# EAGLE board MediumCollar1.1 v33 (EAGLE 9.7.0)
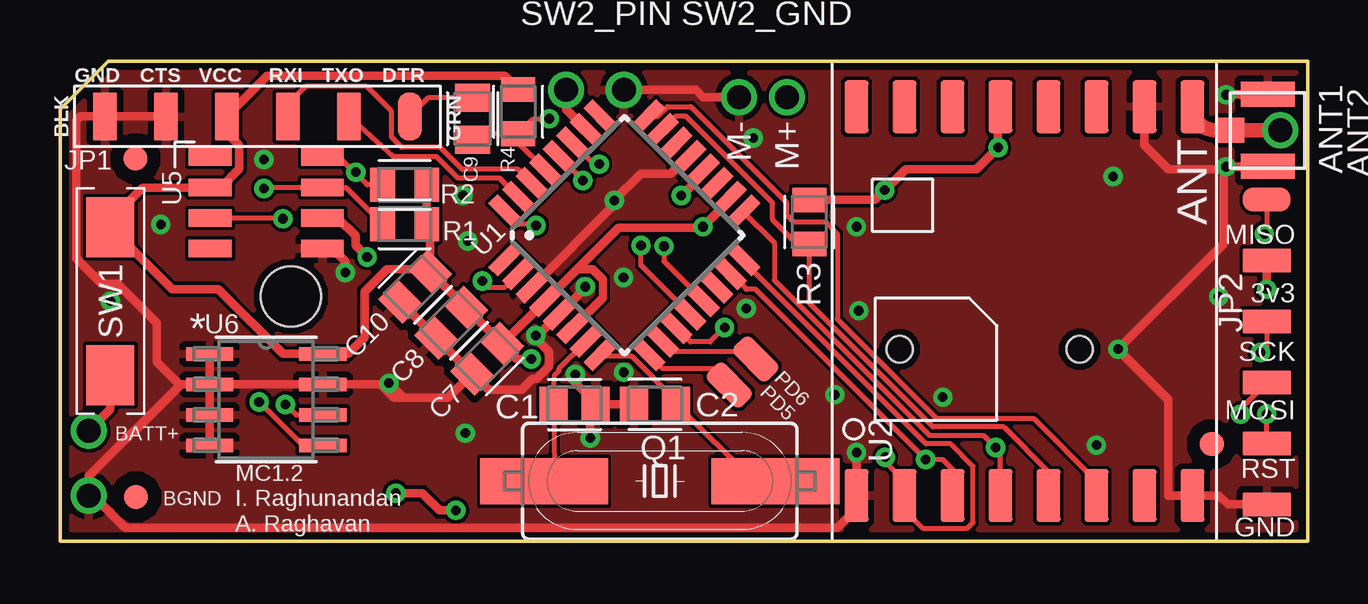
[diagram p0: board, top side]
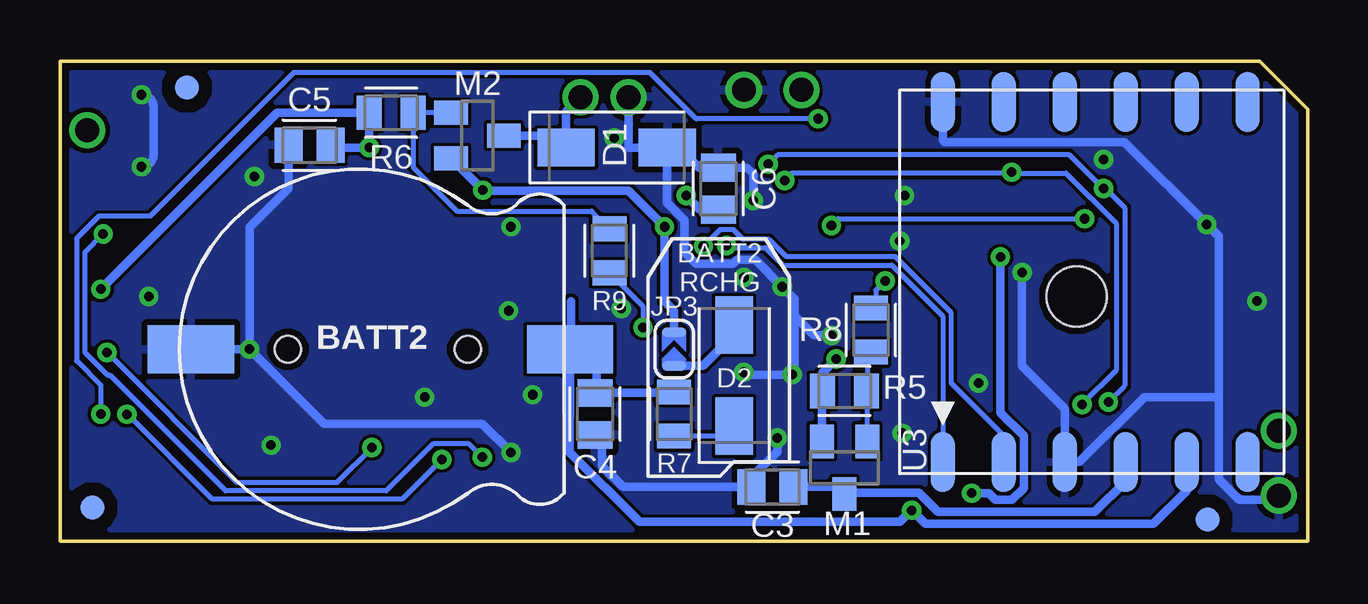
[diagram p1: board, bottom side, seen from below]

Size 52 x 20 mm. Coordinates in mm from the lower left corner, seen from the top.
Outline: 0,18 2,20 52,20 52,0 0,0 0,18
Copper layers (1*16): Top 0.035mm / dielectric 1.5mm / Bottom 0.035mm
Design rules "PCBPower": minimum track width 6mil, minimum drill 0.35mm, track to track 6mil, track to pad 6mil, pad to pad 6mil, via to via 6mil, smd to smd 6mil, copper to edge 12mil, drill to drill 12mil, minimum pad ring 10mil, minimum via ring 8mil, stop-mask expansion 4mil, vias tented up to drill 0.4mm, thermal gap 10mil
Net classes: 0 default: width 0.2 mm, drill 0.4 mm; 1 Power: width 0.35 mm, drill 0.4 mm; 2 RF: width 0.35 mm, drill 0.4 mm, clearance 0.203 mm

## Footprints (pad centres in the part's own frame; a part is rotated, then mirrored left to right if it is on the bottom)
BREAKOUT_THT*1*1MM = drill 1: P$1 0,0
U.FL-R-SMT-1(XX) = smd 1.05 x 1.1: 1 0,1.525 | smd 1.05 x 2.25: 2 -1.5,0; 3 1.5,0
CR1220_2P_SMD = smd 3.6 x 2: P+ 8.26,0; P- -7.54,0 | hole 1.1: -3.5,0; 4,0
CAPC2012X110 = smd 1.165 x 1.465: 1 -0.875,0; 2 0.875,0
DIOM5226X290N = smd 2.392 x 1.565: 1 -2.108,0; 2 2.108,0
FIDUCIAL_1MM = smd 1 x 1: 1 0,0
FTDI_DEVICE_SMD(GTS_FLIP) = smd 1 x 2: P1 -6.35,0; P2 -3.81,0; P3 -1.27,0; P4 1.27,0; P5 3.81,0; P6 6.35,0
1X6-THT = smd 1 x 2: P1 -6.35,0; P2 -3.81,0; P3 -1.27,0; P4 1.27,0; P5 3.81,0; P6 6.35,0
NO_JUMPER = smd 0.4 x 1: P$1 -0.7,0; P$2 0.7,0
SOT23 = smd 1 x 1.4: 1 -0.95,-1.1; 2 0.95,-1.1; 3 0,1.1
BREAKOUT_PAD*1*1X2MM = smd 2 x 1: P$1 0,0
HC49UP = smd 5.334 x 1.93: 1 -4.826,0; 2 4.826,0
RESC2012X65 = smd 1.031 x 1.42: 1 -0.919,0; 2 0.919,0
REED_CT05 = smd 2.5 x 2: P1 -3.08,0; P2 3.08,0
QFP32_7X7_0.80 = smd 1.5 x 0.55: 1 -4.2,2.8; 2 -4.2,2; 3 -4.2,1.2; 4 -4.2,0.4; 5 -4.2,-0.4; 6 -4.2,-1.2; 7 -4.2,-2; 8 -4.2,-2.8; 17 4.2,-2.8; 18 4.2,-2; 19 4.2,-1.2; 20 4.2,-0.4; 21 4.2,0.4; 22 4.2,1.2; 23 4.2,2; 24 4.2,2.8 | smd 0.55 x 1.5: 9 -2.8,-4.2; 10 -2,-4.2; 11 -1.2,-4.2; 12 -0.4,-4.2; 13 0.4,-4.2; 14 1.2,-4.2; 15 2,-4.2; 16 2.8,-4.2; 25 2.8,4.2; 26 2,4.2; 27 1.2,4.2; 28 0.4,4.2; 29 -0.4,4.2; 30 -1.2,4.2; 31 -2,4.2; 32 -2.8,4.2
LORA_RFM95W-915S2_16MODULE = smd 2.2 x 1: P1 -8.1,7; P2 -8.1,5; P3 -8.1,3; P4 -8.1,1; P5 -8.1,-1; P6 -8.1,-3; P7 -8.1,-5; P8 -8.1,-7; P9 8.1,-7; P10 8.1,-5; P11 8.1,-3; P12 8.1,-1; P13 8.1,1; P14 8.1,3; P15 8.1,5; P16 8.1,7
L80_PACKAGE = smd 2.5 x 1: 1 15.5,1.8; 2 15.5,4.34; 3 15.5,6.88; 4 15.5,9.42; 5 15.5,11.96; 6 15.5,14.5; 7 0.5,14.5; 8 0.5,11.96; 9 0.5,9.42; 10 0.5,6.88; 11 0.5,4.34; 12 0.5,1.8 | hole 2.5: 8.6,7.37
DS3231MZ+_SOIC8 = smd 1.78 x 0.72: P1 -2.34,1.905; P2 -2.34,0.635; P3 -2.34,-0.635; P4 -2.34,-1.905; P5 2.34,-1.905; P6 2.34,-0.635; P7 2.34,0.635; P8 2.34,1.905
SOIC8-N_MC_MCH = smd 1.97 x 0.558: 1 -2.362,1.905; 2 -2.362,0.635; 3 -2.362,-0.635; 4 -2.362,-1.905; 5 2.362,-1.905; 6 2.362,-0.635; 7 2.362,0.635; 8 2.362,1.905

## Placement (x,y rotation side)
ANT1  BREAKOUT_PADBREAKOUT_THT  [BREAKOUT_THT*1*1MM]  50.86,17.12 90 top
ANT2  U.FL-R-SMT-101  [U.FL-R-SMT-1(XX)]  50.34,17.12 90 top
BATT2  CR1220_SMD  [CR1220_2P_SMD]  39,8 0 bottom
BATT+  BREAKOUT_PADBREAKOUT_THT  [BREAKOUT_THT*1*1MM]  1.2,4.6 0 top
BGND  BREAKOUT_PADBREAKOUT_THT  [BREAKOUT_THT*1*1MM]  1.2,1.9 0 top
C1  33pF  [CAPC2012X110]  21.45,5.7 180 top
C2  33pF  [CAPC2012X110]  24.8,5.7 0 top
C3  1uF  [CAPC2012X110]  22.3,2.26 180 bottom
C4  1uF  [CAPC2012X110]  29.7,5.3 270 bottom
C5  0.1uF  [CAPC2012X110]  41.6,16.5 180 bottom
C6  0.1uF  [CAPC2012X110]  24.56,14.69 270 bottom
C7  0.1uF  [CAPC2012X110]  17.8,7.6 225 top
C8  0.1uF  [CAPC2012X110]  16.3,9.1 225 top
C9  0.1uF  [CAPC2012X110]  17.2,17.6 90 top
C10  4.7uF  [CAPC2012X110]  14.8,10.6 225 top
D1  DIODE  [DIOM5226X290N]  28.8,16.4 0 bottom
D2  DIODE  [DIOM5226X290N]  23.9,6.9 90 bottom
F1  FIDUCIAL  [FIDUCIAL_1MM]  3.17,1.84 0 top
F2  FIDUCIAL  [FIDUCIAL_1MM]  48.01,4.04 0 top
F3  FIDUCIAL  [FIDUCIAL_1MM]  3.15,15.94 0 top
F4  FIDUCIAL  [FIDUCIAL_1MM]  4.17,0.9 0 bottom
F5  FIDUCIAL  [FIDUCIAL_1MM]  46.71,18.9 0 bottom
F6  FIDUCIAL  [FIDUCIAL_1MM]  50.65,1.4 0 bottom
JP1  FTDI_DEVICEGTS_FLIP  [FTDI_DEVICE_SMD(GTS_FLIP)]  8.22,17.7 180 top
JP2  AVR_SPI_PRG_61X6_THT  [1X6-THT]  50.3,7.88 270 top
JP3  NO_JUMPER  [NO_JUMPER]  26.4,8 90 bottom
M1  PMOSFET  [SOT23]  19.3,3.06 180 bottom
M2  PMOSFET  [SOT23]  34.6,16.9 270 bottom
M+  BREAKOUT_PADBREAKOUT_THT  [BREAKOUT_THT*1*1MM]  30.3,18.5 90 top
M-  BREAKOUT_PADBREAKOUT_THT  [BREAKOUT_THT*1*1MM]  28.3,18.5 90 top
PD5  BREAKOUT_PADL  [BREAKOUT_PAD*1*1X2MM]  27.9,6.5 135 top
PD6  BREAKOUT_PADL  [BREAKOUT_PAD*1*1X2MM]  29,7.6 135 top
Q1  8mhz  [HC49UP]  25,2.5 180 top
R1  4.7k  [RESC2012X65]  14.37,13.21 180 top
R2  4.7k  [RESC2012X65]  14.37,14.85 180 top
R3  10k  [RESC2012X65]  31.24,13.3 270 top
R4  10k  [RESC2012X65]  19.1,17.9 270 top
R5  10k  [RESC2012X65]  19.3,6.26 0 bottom
R6  10k  [RESC2012X65]  38.2,17.85 0 bottom
R7  1k  [RESC2012X65]  26.4,5.3 90 bottom
R8  470R  [RESC2012X65]  18.2,8.8 270 bottom
R9  470R  [RESC2012X65]  29.1,12.1 270 bottom
SW1  REED_SWITCH  [REED_CT05]  2.1,10 90 top
SW2_GND  BREAKOUT_PADBREAKOUT_THT  [BREAKOUT_THT*1*1MM]  23.5,18.8 0 top
SW2_PIN  BREAKOUT_PADBREAKOUT_THT  [BREAKOUT_THT*1*1MM]  21.1,18.8 0 top
U1  ATMEGA328P-AU  [QFP32_7X7_0.80]  23.53,12.75 45 top
U2  LORA_RFM95W-915S2_MODULE  [LORA_RFM95W-915S2_16MODULE]  40.2,10 90 top
U3  L80_GNSS_MODULE  [L80_PACKAGE]  17,18.8 270 bottom
U5  DS3231MZ+  [DS3231MZ+_SOIC8]  8.6,14.1 0 top
U6  24LC128T-I/SN  [SOIC8-N_MC_MCH]  8.6,5.9 0 top

## Library data of the parts
ANT1 BATT+ BGND F1-F6 JP1-JP3 M+ M- PD5 PD6 SW1 SW2_GND SW2_PIN U3 = CDC Library
ANT2 = Connector; CATEGORY: Connector; DESCRIPTION: Ultra Small Surface Mount Coaxial Connectors; LINK: https://www.sunrom.com/p/rf-antenna-connector-smd-ipx-ipex-ulf-mhf; MANUFACTURER: Hirose Electric Co Ltd; MPN: U.FL-R-SMT-1(01); OPERATING_TEMPERATURE: -40˚C to +90˚C; PART_STATUS: Active; ROHS_COMPLIANCE: RoHS Compliant; SERIES: U.FL; TYPE: RF Connector
BATT2 = CDC Library; LINK: https://www.sunrom.com/p/battery-socket-for-cr1220
C1 C2 = Capacitor; CATEGORY: Capacitor; LINK: https://www.evelta.com/33-pf-50v-0805-smd-multilayer-ceramic-capacitors-0805cg330j500nt-fenghua/
C3 C4 = Capacitor; CATEGORY: Capacitor; LINK: https://www.sunrom.com/p/1uf-105-smd-0805-pack-of-10
C5-C9 = Capacitor; CATEGORY: Capacitor; LINK: https://www.sunrom.com/p/100nf-104-0805-2012-metric
C10 = Capacitor; CATEGORY: Capacitor; LINK: https://www.evelta.com/4-7-uf-16v-0805-smd-multi-layer-ceramic-capacitor-0805x475k160ct-walsin/
D1 D2 = Diode; CATEGORY: Diode; LINK: https://www.sunrom.com/p/m7-1n4007-smd-1a-diode; SUB-CATEGORY: Rectifier
M1 M2 = Transistor; CATEGORY: Transistor; LINK: https://www.sunrom.com/p/ao3401-a19t-sot-23-p-ch-mosfet; LINK1: https://www.sunrom.com/p/ao3401-a19t-sot-23-p-ch-mosfet; SUB-CATEGORY: MOSFET; TYPE: P-Channel
Q1 = CDC Library; LINK: https://www.evelta.com/hc-49smd-8mhz-20pf-20ppm-2pad-smd-smt-quartz-crystal/; OC_FARNELL: unknown; OC_NEWARK: unknown
R1 R2 = Resistor; CATEGORY: Resistor; LINK: https://www.sunrom.com/p/4k7-1-0805-pack-of-100; SUB-CATEGORY: Fixed
R3-R6 = Resistor; CATEGORY: Resistor; LINK: https://www.sunrom.com/p/10k-1-0805-pack-of-100; SUB-CATEGORY: Fixed
R7 = Resistor; CATEGORY: Resistor; LINK: https://www.sunrom.com/p/1k-1-0805-pack-of-100; SUB-CATEGORY: Fixed
R8 R9 = Resistor; CATEGORY: Resistor; LINK: https://www.sunrom.com/p/470r-1-0805-pack-of-100; SUB-CATEGORY: Fixed
U1 = CDC Library; LINK: https://www.evelta.com/atmega328p-au-ic-mcu-8bit-32kb-flash-32tqfp/
U2 = CDC Library; LINK: https://www.digikey.in/product-detail/en/rf-solutions/RFM95W-915S2/RFM95W-915S2-ND/6564923
U5 = CDC Library; LINK: https://www.evelta.com/ds3231mz-maxim-integrated-alarm-rtc-i2c-2-3-v-to-5-5-v/
U6 = AD_ECAD_Toolbag; BUILT_BY: EMA_UL_Team; LINK: https://www.evelta.com/24lc512-i-sn-microchip-technology-eeprom-i2c-512-kbit/; MANUFACTURER_PART_NUMBER: 24LC128T-I/SN; SOURCELIBRARY: Microchip_2014-06-20; VAL: 24LC512-I/SN; VENDOR: Microchip

## Nets
3.3V_GPS [Power]: C3.1 M1.3 U3.4
+3.3V [Power]: C5.1 C7.1 C8.1 C10.1 JP1.P4 JP2.P2 JP3.P$2 M1.2 M2.2 R1.1 R2.1 R3.1 R4.1 R5.1 R6.1 SW1.P2 U1.4 U1.6 U1.18 U2.P13 U5.P2 U6.8
+BATT [Power]: BATT+.P$1 SW1.P1
AREF: C6.2 U1.20
BREAK_MOTOR+ [Power]: D1.1 M2.3 M+.P$1
CS_LR: R3.2 U1.23 U2.P5
DTR: C9.2 JP1.P1
GND [Power]: ANT2.2 ANT2.3 BATT2.P- BGND.P$1 C1.1 C2.1 C3.2 C4.2 C5.2 C6.1 C7.2 C8.2 C10.2 D1.2 JP1.P5 JP1.P6 JP2.P6 M-.P$1 SW2_GND.P$1 U1.3 U1.5 U1.21 U2.P1 U2.P8 U2.P10 U3.3 U3.12 U5.P5 U6.1 U6.2 U6.3 U6.4 U6.7
GPS_POWER: M1.1 R5.2 R8.2
GPWR: R8.1 U1.2
INT0: U1.32 U5.P3
LR_ANT [RF]: ANT1.P$1 ANT2.1 U2.P9
MISO: JP2.P1 U1.16 U2.P2
MOSI: JP2.P4 U1.15 U2.P3
MOTOR_PWR: M2.1 R6.2 R9.1
MPWR: R9.2 U1.11
PD5: PD5.P$1 U1.9
PD6: PD6.P$1 U1.10
Q1: C2.2 Q1.1 U1.8
Q2: C1.2 Q1.2 U1.7
RESET_LR: U1.24 U2.P6
RST: C9.1 JP2.P5 R4.2 U1.29
RTC_BATT [Power]: BATT2.P+ C4.1 R7.2 U3.5 U5.P6
RTC_RCHG: D2.1 R7.1
RTC_RCHG2: D2.2 JP3.P$1
RX_GPS: U1.12 U3.1
RXD: JP1.P3 U1.30
SCK: JP2.P3 U1.17 U2.P4
SCL: R2.2 U1.28 U5.P8 U6.6
SDA: R1.2 U1.27 U5.P7 U6.5
SW2: SW2_PIN.P$1 U1.26
TX_GPS: U1.13 U3.2
TXD: JP1.P2 U1.31

## Tracks (layer width: path | path; a pad name or v marks a point on that pad's centre or on a via)
3.3V_GPS
  Bottom 0.35: C3.1 19.6,2.26 M1.3 19.24,2.02 16.2,2.02 15.4,1.22 8.86,1.22 7.58,2.5 U3.4
+3.3V  (via drill 0.4)
  Top 0.35: U1.6 22.63,10.15 22.63,10.9 22.2,11.33 21.55,11.33 | C10.1 C8.1 C7.1 | C10.1 15.3,11.34 13.64,11.34 12.7,10.4 12.7,8.51 12,7.8 U6.8 9.29,7.8 6.6,10.5 4.68,10.5 SW1.P2 2.1,13.38 3.46,14.73 U5.P2 6.7,14.73 7.48,15.51 7.48,16.5 6.96,17.02 JP1.P4 8.64,19.39 18.53,19.39 R4.1 | 21.55,11.33 U1.4 18.44,8.22 C7.1 | R2.1 R1.1 15.42,13.08 C10.1 | JP2.P2 v50.3,10.5 | C7.1 19.05,7.59 v19.65,7.59 | U1.18 27.91,14.21 v26.8,13.1 26.75,13.05 23.27,13.05 21.55,11.33 | R3.1 33.97,14.22 v34.38,14.62 35.25,15.5 38.2,15.5 v39.1,16.4 39.1,18 U2.P13
  Bottom 0.35: v50.3,10.5 42.95,17.85 R6.1 39.12,16.42 v39.1,16.4 40.62,16.4 C5.1 | M2.2 v34.38,14.62 34.35,14.6 28.3,14.6 v26.8,13.1 26.8,10 26.4,9.6 JP3.P$2 | M1.2 20.25,6.17 20.22,6.2 R5.1 20.22,7.02 v19.65,7.59
+BATT
  Top 0.35: BATT+.P$1 2.1,5.5 SW1.P1
AREF  (via drill 0.4)
  Top 0.35: v25.9,14.4 26.78,15.28 U1.20
  Bottom 0.35: C6.2 25.32,13.81 v25.9,14.4
BREAK_MOTOR+
  Bottom 0.35: M+.P$1 30.9,17.9 D1.1 31.41,16.9 M2.3
CS_LR
  Top 0.2: U2.P5 41.2,2.9 39.34,4.76 36.39,4.76 31.24,9.92 R3.2 30.72,12.38 29.7,13.4 29.7,14.1 26.1,17.7 25.65,17.7 U1.23
DTR
  Top 0.2: C9.2 15.35,18.48 JP1.P1
GND  (via drill 0.4)
  Top 0.35: v21.9,10.6 21.9,10.55 U1.5 19.92,8.57 v19.83,8.57 19.83,8.45 20.38,7.89 20.38,7.29 19.85,6.76 19.71,6.76 19.25,6.3 17.86,6.3 C7.2 | C7.2 C8.2 C10.2 | U1.21 26.14,16 25.45,15.31 24.21,15.31 v23.1,14.2 23.1,14.02 U1.3 | U6.4 U6.3 U6.2 | U6.2 U6.1 | U6.2 U6.7 13.37,6.54 13.93,5.97 14.33,5.97 | U6.2 5.04,6.54 5,6.5 | 5,6.5 1.2,2.7 BGND.P$1 1.38,1.9 2.72,0.56 32.4,0.56 33.2,1.36 U2.P1 v33.2,3.7 | 14.33,5.97 16.17,5.97 C7.2 | JP2.P6 48.67,1.53 48.3,1.9 U2.P8 46.2,1.9 46.2,5.9 v44.1,8 48.5,12.4 48.5,15.5 | ANT2.2 arc-90 50.32,15.6 v48.6,15.6 48.5,15.5 | v48.6,18.6 arc-90 48.62,18.62 ANT2.3 | C1.1 C2.1 | v21.48,6.94 21.48,6.59 C1.1 | v22.1,4.3 22.1,5.42 C1.1 | U2.P10 45.2,16.5 46.2,15.5 48.5,15.5 | U5.P5 11.34,12.2 11.9,11.63 v11.9,11.2 | 5,6.5 4.03,7.47 4.03,9.11 2.4,10.73 1.74,10.73 0.67,11.79 0.67,17.52 0.85,17.7 JP1.P6 JP1.P5 | M-.P$1 26.8,18.5 26.5,18.8 SW2_GND.P$1 | v13.72,6.58 14.33,5.97
  Bottom 0.35: 3.7,6 3.7,12.7 v4.2,13.2 7.63,16.63 15.13,16.63 15.2,16.7 U3.12 | 3.7,6 6.8,6 9.5,3.3 U3.3 10.12,5.52 11.9,7.3 v11.9,11.2 | 3.7,6 3.7,2.58 2.84,1.72 1.38,1.72 BGND.P$1 | v48.6,18.6 arc90 48.1,18.1 48.1,16.1 arc90 v48.6,15.6 | 21.39,9.39 21.39,7.04 v21.48,6.94 23.34,6.94 23.44,7.04 v23.5,7.04 | 21.39,9.39 21.39,10.09 v21.9,10.6 23.02,11.72 23.79,11.72 23.95,11.56 25.48,11.56 25.97,12.05 25.97,13.38 26.69,14.1 D1.2 | v22.1,4.3 22.1,3.73 23.18,2.66 C3.2 28.54,2.26 29.4,3.12 29.4,4.12 C4.2 | BATT2.P- v44.1,8 | v19.83,8.57 20.57,8.57 21.39,9.39 | v33.2,3.7 34.4,4.9 41,4.9 v44.1,8 | D1.2 26.19,16.4 25.36,15.56 C6.1 23.36,15.56 23.1,15.3 v23.1,14.2 | C5.2 42.48,14.7 44.1,13.07 v44.1,8 | D1.2 28.3,16.4 M-.P$1
  other vias: 16.9,4.5 16.8,14.4 8.5,15.9 2.1,10 23.49,10.99 28.6,9.7 33.2,13.1 33.3,9.6 32.3,6.1 36.8,6 43.2,4 48.3,10.2 43.9,15.2 28.9,16.8 17,12.51
  pour Top (rank 2): 0,0 52,0 52,20 1.5,20 0,18.5
  pour Bottom (rank 2): 0,0 52,0 52,20 1,20 0,19
GPS_POWER
  Bottom 0.2: M1.1 18.35,6.23 | 18.35,6.23 R5.2 | R8.2 18.35,7.73 18.35,6.23
GPWR  (via drill 0.4)
  Top 0.2: U1.2 18.54,10.59 17.86,10.59 v17.6,10.84
  Bottom 0.2: v17.6,10.84 18,10.45 18,9.92 R8.1
INT0  (via drill 0.4)
  Top 0.2: U1.32 19.11,13.2 19.8,13.2 v19.84,13.16 | v9.29,13.44 9.27,13.46 U5.P3
  Bottom 0.2: v19.84,13.16 19.56,13.44 v9.29,13.44
LR_ANT
  Top 0.61: ANT1.P$1 ANT2.1 48.18,17.12 arc-90 U2.P9
MISO  (via drill 0.4)
  Top 0.2: JP2.P1 50.3,12.9 v50.2,12.8 | v34.4,3.5 34.4,3.3 35.2,2.5 U2.P2 35.2,1.3 35.95,0.55 37.83,0.55 38.05,0.77 38.05,3.13 37.13,4.06 36.1,4.06 28.48,11.68 U1.16
  Bottom 0.2: v34.4,3.5 34.96,4.06 36.44,4.06 38.4,2.1 45.1,2.1 49.91,6.91 50.01,6.91 50.96,7.86 50.96,12.04 v50.2,12.8
MOSI  (via drill 0.4)
  Top 0.2: U2.P3 37.2,3 36.8,3.4 v36.09,3.4 29,10.49 28.61,10.49 U1.15 | JP2.P4 49.21,5.52 v49.21,5.29
  Bottom 0.2: v49.21,5.29 49.19,5.29 45.65,1.75 37.74,1.75 v36.09,3.4
MOTOR_PWR
  Bottom 0.2: M2.1 R6.2 37.28,15.58 35.46,13.76 29.84,13.76 R9.1
MPWR  (via drill 0.4)
  Top 0.2: v27.7,8.9 27.1,8.3 26.28,8.3 U1.11
  Bottom 0.2: R9.2 27.7,9.78 v27.7,8.9
PD5
  Top 0.2: U1.9 25.11,7.2 27.2,7.2 PD5.P$1
PD6
  Top 0.2: U1.10 25.55,7.9 28.7,7.9 PD6.P$1
Q1
  Top 0.2: Q1.1 28.96,2.5 C2.2 25.68,5.86 23.84,7.7 22.64,7.7 U1.8
Q2
  Top 0.2: Q1.2 20.62,2.95 C1.2 20.62,6.93 20.81,7.11 20.81,7.2 U1.7
RESET_LR
  Top 0.2: U2.P6 43.2,2.5 40.59,5.11 36.54,5.11 32.48,9.18 32.4,9.25 32.4,12.8 31.9,13.3 30.57,13.3 30.27,13.6 30.27,14.13 26.29,18.11 25.32,18.11 24.9,17.7 U1.24
RST  (via drill 0.4)
  Top 0.2: JP2.P5 v50.3,5.3 | U1.29 19.1,16.61 R4.2 | R4.2 17.46,16.98 C9.1 | R4.2 19.72,17.6 v20.4,17.6
  Bottom 0.2: v50.3,5.3 50.3,6.5 51.31,7.51 51.31,12.62 50.38,13.54 48.24,13.54 42.27,19.52 27.4,19.52 25.48,17.6 v20.4,17.6
RTC_BATT  (via drill 0.4)
  Top 0.35: v14,2 15.1,2 15.81,1.29 v16.5,1.29 | U5.P6 11.58,13.46 12.32,12.72 12.32,12.32 v12.8,11.84
  Bottom 0.35: BATT2.P+ 30.24,8 29.64,7.4 29.64,6.24 C4.1 26.44,6.17 R7.2 | BATT2.P+ 30.74,5.16 30.76,5.14 30.76,3.71 27.85,0.8 16.99,0.8 v16.5,1.29 15.93,0.72 6.42,0.72 5.04,2.1 U3.5 | v14,2 13.28,2 13,1.72 12.32,1.72 11.83,2.21 11.83,4.39 12.8,5.36 v12.8,11.84 | BATT2.P+ 30.7,8.04 30.7,10
RTC_RCHG
  Bottom 0.2: D2.1 24.31,4.38 R7.1
RTC_RCHG2
  Bottom 0.35: D2.2 23.9,8.61 25.21,7.3 JP3.P$1
RX_GPS  (via drill 0.4)
  Top 0.2: U1.12 24.22,11.49 v24.22,12.32
  Bottom 0.2: v24.22,12.32 24.19,12.32 24.1,12.23 22.6,12.23 21.87,11.5 17.33,11.5 15.2,9.37 U3.1
RXD
  Top 0.2: U1.30 19.09,15.49 16.76,15.49 15.84,16.41 14.23,16.41 13.82,16.82 13.82,17.91 12.78,18.95 10.25,18.95 9.49,18.2 JP1.P3
SCK  (via drill 0.4)
  Top 0.2: JP2.P3 50.3,8.13 v50.04,7.86 | U2.P4 39.2,3.7 v39,3.9 38.49,4.41 36.24,4.41 29.77,10.88 29.77,12.44 U1.17
  Bottom 0.2: v39,3.9 40.45,2.45 44.62,2.45 v50.04,7.86
SCL  (via drill 0.4)
  Top 0.2: U1.28 v21.8,15.04 v21.8,15.03 | R2.2 12.79,14.85 12.3,15.34 | U5.P8 11.63,16 12.3,15.34 | U6.6 9.84,5.26 v9.4,5.7 | v12.34,15.38 12.3,15.34
  Bottom 0.2: 12.3,15.34 10.07,15.34 7.97,13.24 7.97,7.12 v9.4,5.7 | v21.8,15.03 21.49,15.34 12.3,15.34 | 12.3,15.34 v12.34,15.38
SDA  (via drill 0.4)
  Top 0.2: R1.2 11.92,14.73 U5.P7 8.57,14.73 8.53,14.7 v8.5,14.7 | U6.5 10.11,4 v8.3,5.8 | U1.27 22.26,15.71 v22.48,15.71
  Bottom 0.2: v8.3,5.8 7.62,6.48 7.62,13.89 8.43,14.7 v8.5,14.7 8.53,14.7 9.93,16.09 22.09,16.09 v22.48,15.71
SW2
  Top 0.35: U1.26 21.1,18 SW2_PIN.P$1
TX_GPS  (via drill 0.4)
  Top 0.2: v25.18,12.29 25.18,11.66 U1.13
  Bottom 0.2: U3.2 12.66,4.4 14.85,6.59 14.85,9.52 17.18,11.85 21.73,11.85 22.45,12.58 23.52,12.58 23.92,12.98 24.49,12.98 24.87,12.6 24.87,12.59 v25.18,12.29
TXD
  Top 0.2: U1.31 18.32,15.13 16.59,15.13 15.7,16.02 13.89,16.02 JP1.P2

## Text on the board
tPlace: MISO / 3v3 / SCK / MOSI / RST / GND | MC1.2 / I. Raghunandan / A. Raghavan
bPlace: BATT2 / RCHG
tNames: JP1